# Altium PCB HW_ADHERENT_SYSCTRL_R1.PcbDoc (part 3 of 3)
Units mm, origin at the board's own origin, x right, y up, seen from the top; angles counter-clockwise.
Board outline 160 x 150 mm, 4 copper layers (Top Layer, Int1 (GND), Int2 (PWR), Bottom Layer), stack 1.369 mm thick; 228 components, 143 nets, 829 pads, 0 vias.
Unrouted connection lines stored in the file: 328.
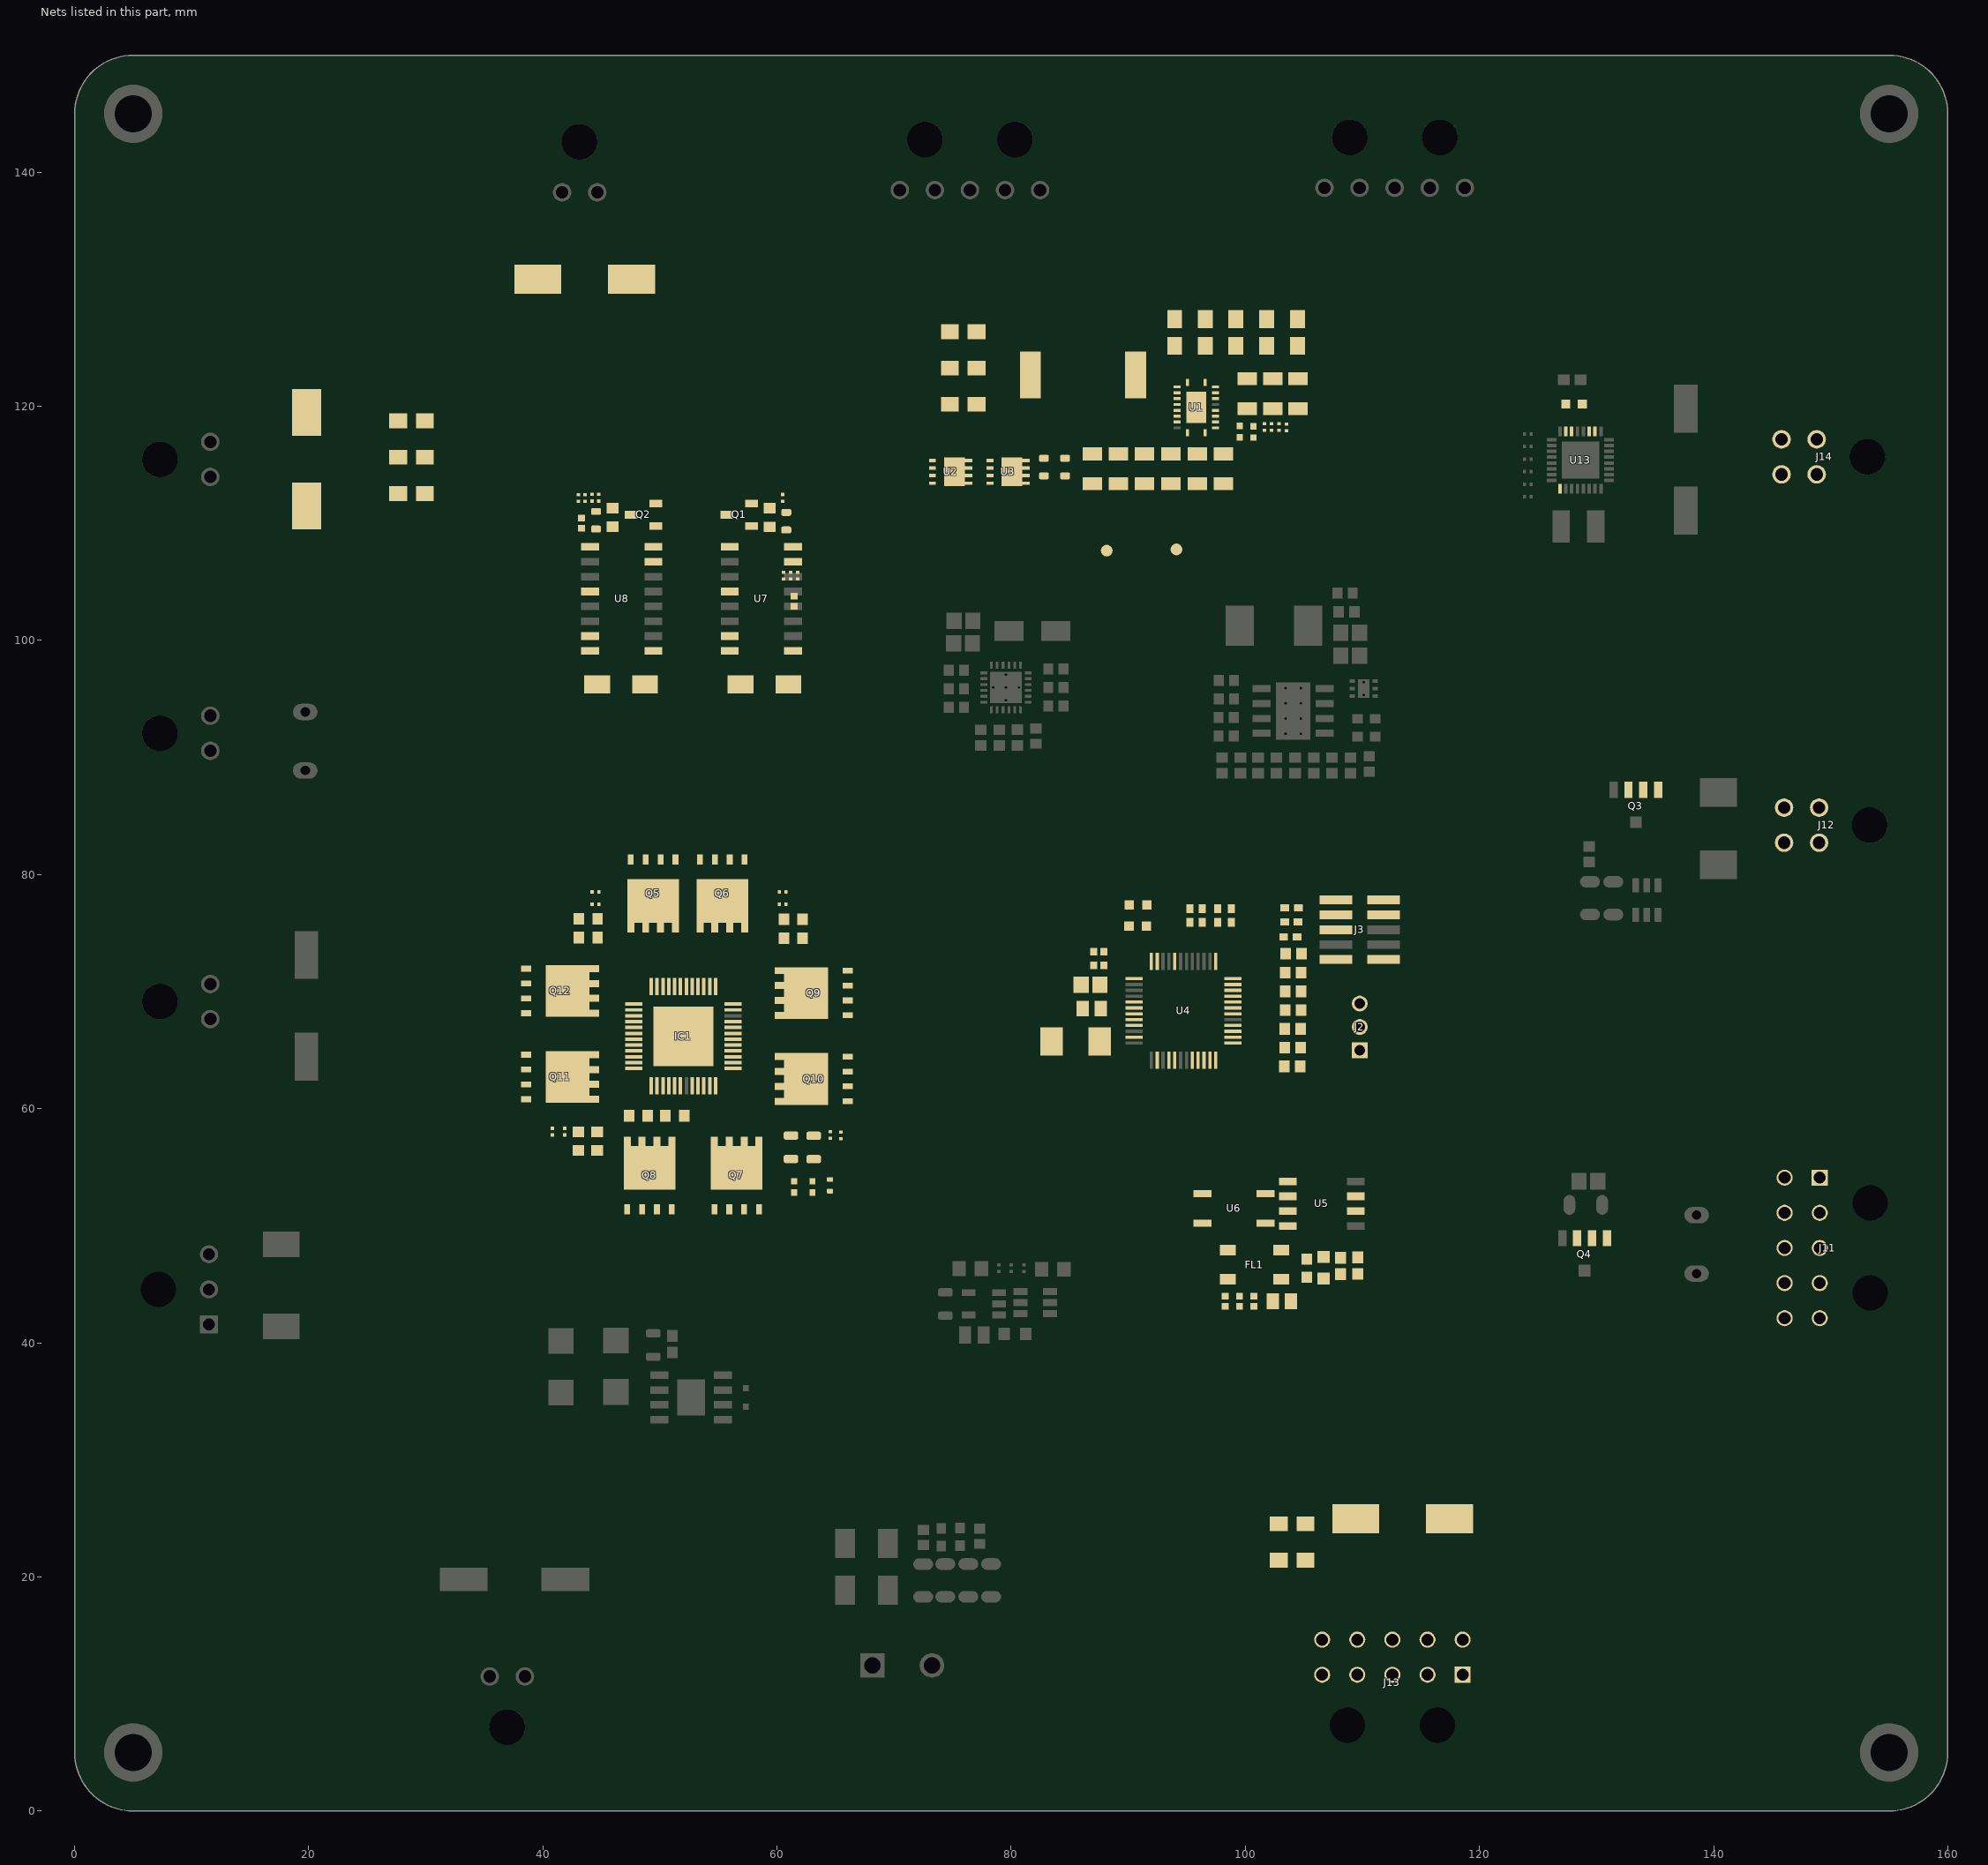
[diagram p4: the nets of this part, all layers, seen from the top]

## Part data (continued)
U7 U8: "4/0 Driver 16-SOIC", manufacturer="Texas Instruments", Supplier="Digi; 296-24344-6-ND"
U9: "OR Controller N+1 ORing Controller N-Channel 1:1 SOT-23-6"
U10: "4.5-V to 60-V, 31mÎ©, 0.6-6A eFuse with output power limiting 24-VQFN -40 to 125", Manufacturer_Name="Texas Instruments", Copyright="Copyright (C) 2025 Ultra Librarian. All rights reserved.", Manufacturer_Part_Number=TPS16637RGER, RefDes=RefDes, Type=TYPE
U11: "1-A, low-IQ high-accuracy low-dropout (LDO) voltage regulator with enable", Package="WSON-6 Texas Instruments", Check_prices=https://www.snapeda.com/parts/TLV75733PDRVR/Texas+Instruments/view-part/?ref=eda, MF="Texas Instruments", MP=TLV75733PDRVR, SnapEDA_Link=https://www.snapeda.com/parts/TLV75733PDRVR/Texas+Instruments/view-part/?ref=snap
U12: "SIMPLE SWITCHERÂ® 3.8V to 36V, 3A Synchronous Buck Converter With Ultra-Low EMI", Package="HSOIC-8 Texas Instruments", Check_prices=https://www.snapeda.com/parts/LMR33630ADDAR/Texas+Instruments/view-part/?ref=eda, MF="Texas Instruments", MP=LMR33630ADDAR, SnapEDA_Link=https://www.snapeda.com/parts/LMR33630ADDAR/Texas+Instruments/view-part/?ref=snap
U13: "Bipolar Motor Driver Power MOSFET SPI, Step/Direction, UART 32-TQFN (5x5)", manufacturer="Analog Devices Inc./Maxim Integrated", Supplier="Digi; 505-TMC2240ATJ+-ND"
U14: "Undefined or Miscellaneous", Manufacturer_Name="Texas Instruments", Mouser Part Number=595-INA181A2IDBVR, Arrow Part Number=INA181A2IDBVR, Arrow Price/Stock=https://www.arrow.com/en/products/ina181a2idbvr/texas-instruments.html?utm_currency=USD&region=nac, Datasheet Link=http://www.ti.com/general/docs/suppproductinfo.tsp?distId=26&gotoUrl=http%3A%2F%2Fwww.ti.com%2Flit%2Fgpn%2Fina181, Height=1.45mm, Manufacturer_Part_Number=INA181A2IDBVR, Mouser Price/Stock=https://www.mouser.co.uk/ProductDetail/Texas-Instruments/INA181A2IDBVR?qs=5aG0NVq1C4wvxWxbAGEmKw%3D%3D
Y1: "8 MHz Â±30ppm Crystal 8pF 100 Ohms 2-SMD, No Lead", Package="SMD-2 ECS Inc.", Check_prices=https://www.snapeda.com/parts/ECS-80-8-30Q-VS-TR/ECS/view-part/?ref=eda, MF="ECS Inc.", MP=ECS-80-8-30Q-VS-TR, SnapEDA_Link=https://www.snapeda.com/parts/ECS-80-8-30Q-VS-TR/ECS/view-part/?ref=snap

## Nets (pads, with @x,y where several pads share a name; then routed paths per layer and width w, separated by ;. In a path a pad name is that pad's centre, name@x,y a point inside that pad or via, vN(x,y) a via of type N, cw(c..) or ccw(c..) an arc to the next point about the centre after c; other vN are vias at no path point)
29_VCC: C64.2 IC1.29 R51.2
+3V3: C11.2 C12.1 C13.1 C14.1 C15.1 C35.2 C37.2 C67.2 FB1.1 FB2.1 IC1.20 IC1.22 J3.1 R6.1 R7.1 R24.2 R25.2 R29.2 R30.2 U4.1 U4.24 U4.36 U4.48 U7.16 U8.16
+3V3_CAN: C22.2 C23.1 FB2.2 U5.3
+12V_SYS: C9.1 C10.1 C25.2 C26.2 C27.2 C28.2 C29.2 L1.2 T1.1
+24V_BUCK_IN: C1.1 C2.2 C3.2 C4.2 C5.2 R1.2 R2.2 U2.D
BOOT0: R6.2 R8.1 U4.44
BOOT1: R9.2 U4.20
CAN1_N: C24.2 FL1.3 R14.1
CAN1_P: C21.1 FL1.4 R13.1
CAN_F_N: FL1.2 U5.6
CAN_F_P: FL1.1 U5.7
CAN_RX: U4.32 U5.4
CAN_TX: U4.33 U5.1
GND: C1.2 C2.1 C3.1 C4.1 C5.1 C6.1 C7.1 C9.2 C10.2 C11.1 C12.2 C13.2 C14.2 C15.2 C16.2 C17.1 C18.1 C19.2 C20.2 C21.2 C22.1 C23.2 C24.1 C25.1 C26.1 C27.1 C28.1 C29.1 C31.1 C35.1 C36.1 C37.1 C38.1 C61.1 C62.1 C63.1 C64.1 C65.1 C67.1 IC1.6 IC1.11 IC1.12 IC1.17 IC1.18 IC1.21 IC1.23 IC1.24 IC1.25 IC1.30 IC1.49 J2.1 J3.3 J3.5 J3.9 Q1.2 Q2.2 R3.1 R4.1 R8.2 R9.1 R11.2 R12.2 R19.1 R23.1 R28.1 R33.1 R59.1 U1.6 U1.12 U1.15 U1.21 U3.S U4.8 U4.23 U4.35 U4.47 U5.2 U6.2 U7.8 U7.15 U8.8 U8.15
LED_STAT: D3.2 U4.16
LED_USER: D4.2 U4.17
NetC6_2: C6.2 R2.1 U1.20
NetC7_2: C7.2 U1.3
NetC8_1: C8.1 C30.2 L1.1 R17.2 U1.19 U2.S U3.D
NetC8_2: C8.2 U1.17
NetC30_1: C30.1 R17.1 U1.11
NetC31_2: C31.2 U1.14
NetC32_1: C32.1 C33.1 C34.1 R22.1 R23.2 U1.5
NetC32_2: C32.2 R21.2 U1.4
NetC33_2: C33.2 R20.1
NetC34_2: C34.2 R21.1
NetC36_2: C36.2 R26.2
NetC38_2: C38.2 R31.2
NetC59_1: C59.1 IC1.40 J12.1 Q5.S Q6.D
NetC59_2: C59.2 IC1.42
NetC60_1: C60.1 IC1.32
NetC60_2: C60.2 IC1.31
NetC61_2: C61.2 D1.1 D2.1 IC1.33 J11.9 J13.9 Q5.D Q7.D Q9.D Q10.D R52.2
NetC62_2: C62.2 IC1.3
NetC63_2: C63.2 IC1.5 R51.1
NetC66_1: C66.1 IC1.37 J12.2 Q7.S Q8.D
NetC66_2: C66.2 IC1.35
NetC68_1: C68.1 IC1.45 J12.4 Q9.S Q11.D
NetC68_2: C68.2 IC1.43
NetC69_1: C69.1 IC1.48 J12.3 Q10.S Q12.D
NetC69_2: C69.2 IC1.2
NetD1_2: D1.2 Q1.3
NetD2_2: D2.2 J13.10 Q2.3
NetD3_1: D3.1 R11.1
NetD4_1: D4.1 R12.1
NetIC1_1: IC1.1
NetIC1_7: IC1.7
NetIC1_8: IC1.8
NetIC1_9: IC1.9
NetIC1_10: IC1.10
NetIC1_13: IC1.13
NetIC1_14: IC1.14
NetIC1_15: IC1.15
NetIC1_16: IC1.16
NetIC1_26: IC1.26
NetIC1_27: IC1.27
NetIC1_28: IC1.28
NetIC1_36: IC1.36 R53.1
NetIC1_38: IC1.38 R54.1
NetIC1_39: IC1.39 R50.1
NetIC1_41: IC1.41 R49.1
NetIC1_44: IC1.44
NetIC1_46: IC1.46 R57.1
NetIC1_47: IC1.47 R58.1
NetJ11_1: J11.1
NetJ11_2: J11.2
NetJ11_3: J11.3
NetJ11_4: J11.4
NetJ11_5: J11.5
NetJ11_6: J11.6
NetJ11_7: J11.7 R25.1 R26.1
NetJ11_8: J11.8 J13.8
NetJ11_10: J11.10
NetJ13_1: J13.1
NetJ13_2: J13.2
NetJ13_3: J13.3
NetJ13_4: J13.4
NetJ13_5: J13.5
NetJ13_6: J13.6
NetJ13_7: J13.7
NetJ14_1: J14.1 U13.23
NetJ14_2: J14.2 U13.22
NetJ14_3: J14.3 U13.18
NetJ14_4: J14.4 U13.19
NetQ1_1: Q1.1 R27.2
NetQ2_1: Q2.1 R32.2
NetQ3_1: Q3.1 Q3.2 Q3.3
NetQ4_1: Q4.1 Q4.2 Q4.3
NetQ5_G: Q5.G R49.2
NetQ6_G: Q6.G R50.2
NetQ6_S: Q6.S Q8.S
NetQ7_G: Q7.G R53.2
NetQ8_G: Q8.G R54.2
NetQ9_G: Q9.G R55.2
NetQ10_G: Q10.G R56.2
NetQ11_G: Q11.G R57.2
NetQ11_S: Q11.S Q12.S
NetQ12_G: Q12.G R58.2
NetR1_1: R1.1 R3.2 U1.1
NetR4_2: R4.2 U1.2
NetR5_1: R5.1 U1.18
NetR5_2: R5.2 U2.G
NetR13_2: R13.2 U6.3
NetR14_2: R14.2 U6.4
NetR15_1: R15.1 U6.1
NetR15_2: R15.2 U4.14
NetR16_1: R16.1
NetR16_2: R16.2 U1.8
NetR18_1: R18.1 U1.13
NetR18_2: R18.2 U3.G
NetR19_2: R19.2 U1.10
NetR20_2: R20.2 R22.2
NetR24_1: R24.1 R29.1 U7.12 U8.12
NetR27_1: R27.1 R28.2
NetR30_1: R30.1 R31.1
NetR32_1: R32.1 R33.2
NetR55_1: R55.1
NetR56_1: R56.1
NetR59_2: R59.2 U13.1
NetT2_1: T2.1 U1.7
NetU4_11: U4.11
NetU7_1: U7.1
NetU7_7: U7.7
NetU7_9: U7.9
NetU8_1: U8.1
NetU8_7: U8.7
NetU8_9: U8.9
NFC_IRQ: U4.22
NFC_RESET: U4.21
NRST: C16.1 J3.10 R7.2 U4.7
OSC_IN: C18.2 U4.5 Y1.2
OSC_OUT: R10.1 U4.6
OSC_OUT_Y: C17.2 R10.2 Y1.1
SPI2_CS_NFC: U4.25
SPI2_MISO: U4.27
SPI2_MOSI: U4.28
SPI2_SCLK: U4.26
SWCLK: J3.4 U4.37
SWDIO: J3.2 U4.34
USART1_RX: J2.3 U4.31
USART1_TX: J2.2 U4.30
VDDA: C19.1 C20.1 FB1.2 U4.9
VSA: C65.2 IC1.4 R52.1
pads on no net: C39.1 C39.2 C40.1 C40.2 C41.1 C41.2 C42.1 C42.2 C43.1 C43.2 C44.1 C44.2 C45.1 C45.2 C46.1 C46.2 C47.1 C47.2 C48.1 C48.2 C49.1 C49.2 C50.1 C50.2 C51.1 C51.2 C52.1 C52.2 C53.1 C53.2 C54.1 C54.2 C55.1 C55.2 C56.1 C56.2 C57.1 C57.2 C58.1 C58.2 C70.1 C70.2 C71.1 C71.2 C72.1 C72.2 C73.1 C73.2 C74.1 C74.2 C75.1 C75.2 C76.1 C76.2 C77.1 C77.2 C78.1 C78.2 C79.1 C79.2 C80.1 C80.2 C81.1 C81.2 C82.1 C82.2 C83.1 C83.2 D5.1 D5.2 D6.1 D6.2 D7.1 D7.2 D8.1 D8.2 D9.1 D9.2 D10.1 D10.2 D11.1 D11.2 D12.1 D12.2 D13.1 D13.2 D14.1 D14.2 D15.1 D15.2 D16.1 D16.2 F1.1 F1.2 F2.1 F2.2 F3.1 F3.2 F4.1 F4.2 F5.1 F5.2 F6.1 F6.2 F7.1 F7.2 IC1.19 IC1.34 IC2.1 IC2.2 IC2.3 IC2.4 IC2.5 IC2.6 IC2.7 IC2.8 IC2.9 IC3.1 IC3.2 IC3.3 IC3.4 IC3.5 J1.01 J1.02 J3.6 J3.7 J3.8 J4. J4.1 J4.2 J5. J5.1 J5.2 J6. J6.1 J6.2 J7. J7.1 J7.2 J8. J8.1 J8.2 J8.3 J8.4 J8.5 J9. J9.1 J9.2 J9.3 J9.4 J9.5 J10. J10.1 J10.2 J11.11 J11.12 J12. J13.11 J13.12 J14. J15.1 J15.2 J15.3 J15.4 L2.1 L2.2 MTG1.0 MTG2.0 MTG3.0 MTG4.0 Q3.4 Q3.5_6_7_8 Q4.4 Q4.5_6_7_8 R34.1 R34.2 R35.1 R35.2 R36.1 R36.2 R37.1 R37.2 R38.1 R38.2 R39.1 R39.2 R40.1 R40.2 R41.1 R41.2 R42.1 R42.2 R43.1 R43.2 R44.1 R44.2 R45.1 R45.2 R46.1 R46.2 R47.1 R47.2 R48.1 R48.2 R60.1 R60.2 R61.1 R61.2 R62.1 R62.2 R63.1 R63.2 R64.1 R64.2 R65.1 R65.2 R66.1 R66.2 U1.9 U1.16 U4.2 U4.3 U4.4 U4.10 U4.12 U4.13 U4.15 U4.18 U4.19 U4.29 U4.38 U4.39 U4.40 U4.41 U4.42 U4.43 U4.45 U4.46 U5.5 U5.8 U7.2 U7.3 U7.4 U7.5 U7.6 U7.10 U7.11 U7.13 U7.14 U8.2 U8.3 U8.4 U8.5 U8.6 U8.10 U8.11 U8.13 U8.14 U9.1 U9.2 U9.3 U9.4 U9.5 U9.6 U10.1 U10.2 U10.3 U10.4 U10.5 U10.6 U10.7 U10.8 U10.9 U10.10 U10.11 U10.12 U10.13 U10.14 U10.15 U10.16 U10.17 U10.18 U10.19 U10.20 U10.21 U10.22 U10.23 U10.24 U10.25 U10.V U11.1 U11.2 U11.3 U11.4 U11.5 U11.6 U11.7 U11.8 U11.9 U12.1 U12.2 U12.3 U12.4 U12.5 U12.6 U12.7 U12.8 U12.9 U12.10 U12.11 U12.12 U12.13 U12.14 U12.15 U12.16 U12.17 U13.2 U13.3 U13.4 U13.5 U13.6 U13.7 U13.8 U13.9 U13.10 U13.11 U13.12 U13.13 U13.14 U13.15 U13.16 U13.17 U13.20 U13.21 U13.24 U13.25 U13.26 U13.27 U13.28 U13.29 U13.30 U13.31 U13.32 U13.33 U14.1 U14.2 U14.3 U14.4 U14.5 U14.6

## Polygon pours and split planes (outlines as drawn)
no net on Int1 (GND) (split plane): 5,149.49 155,149.49 155.018,149.491 155.294,149.482 155.586,149.453 155.876,149.406 156.163,149.339 156.444,149.253 156.719,149.15 156.987,149.029 157.246,148.89 157.496,148.735 157.734,148.564 157.962,148.377 158.176,148.176 158.377,147.962 158.564,147.734 158.735,147.496 158.89,147.246 159.029,146.987 159.15,146.719 159.253,146.444 159.339,146.163 159.406,145.876 159.453,145.586 159.482,145.294 159.491,145.018 159.49,145 159.49,5 159.491,4.982 159.482,4.706 159.453,4.414 159.406,4.124 159.339,3.837 159.253,3.556 159.15,3.281 159.029,3.013 158.89,2.754 158.735,2.504 158.564,2.266 158.377,2.038 158.176,1.824 157.962,1.623 157.734,1.436 157.496,1.265 157.246,1.11 156.987,0.971 156.719,0.85 156.444,0.747 156.163,0.661 155.876,0.594 155.586,0.547 155.294,0.518 155.018,0.509 155,0.51 5,0.51 4.982,0.509 4.706,0.518 4.414,0.547 4.124,0.594 3.837,0.661 3.556,0.747 3.281,0.85 3.013,0.971 2.754,1.11 2.504,1.265 2.266,1.436 2.038,1.623 1.824,1.824 1.623,2.038 1.436,2.266 1.265,2.504 1.11,2.754 0.971,3.013 0.85,3.281 0.747,3.556 0.661,3.837 0.594,4.124 0.547,4.414 0.518,4.706 0.509,4.982 0.51,5 0.51,145 0.509,145.018 0.518,145.294 0.547,145.586 0.594,145.876 0.661,146.163 0.747,146.444 0.85,146.719 0.971,146.987 1.11,147.246 1.265,147.496 1.436,147.734 1.623,147.962 1.824,148.176 2.038,148.377 2.266,148.564 2.504,148.735 2.754,148.89 3.013,149.029 3.281,149.15 3.556,149.253 3.837,149.339 4.124,149.406 4.414,149.453 4.706,149.482 4.982,149.491
no net on Int2 (PWR) (split plane): 5,149.49 155,149.49 155.018,149.491 155.294,149.482 155.586,149.453 155.876,149.406 156.163,149.339 156.444,149.253 156.719,149.15 156.987,149.029 157.246,148.89 157.496,148.735 157.734,148.564 157.962,148.377 158.176,148.176 158.377,147.962 158.564,147.734 158.735,147.496 158.89,147.246 159.029,146.987 159.15,146.719 159.253,146.444 159.339,146.163 159.406,145.876 159.453,145.586 159.482,145.294 159.491,145.018 159.49,145 159.49,5 159.491,4.982 159.482,4.706 159.453,4.414 159.406,4.124 159.339,3.837 159.253,3.556 159.15,3.281 159.029,3.013 158.89,2.754 158.735,2.504 158.564,2.266 158.377,2.038 158.176,1.824 157.962,1.623 157.734,1.436 157.496,1.265 157.246,1.11 156.987,0.971 156.719,0.85 156.444,0.747 156.163,0.661 155.876,0.594 155.586,0.547 155.294,0.518 155.018,0.509 155,0.51 5,0.51 4.982,0.509 4.706,0.518 4.414,0.547 4.124,0.594 3.837,0.661 3.556,0.747 3.281,0.85 3.013,0.971 2.754,1.11 2.504,1.265 2.266,1.436 2.038,1.623 1.824,1.824 1.623,2.038 1.436,2.266 1.265,2.504 1.11,2.754 0.971,3.013 0.85,3.281 0.747,3.556 0.661,3.837 0.594,4.124 0.547,4.414 0.518,4.706 0.509,4.982 0.51,5 0.51,145 0.509,145.018 0.518,145.294 0.547,145.586 0.594,145.876 0.661,146.163 0.747,146.444 0.85,146.719 0.971,146.987 1.11,147.246 1.265,147.496 1.436,147.734 1.623,147.962 1.824,148.176 2.038,148.377 2.266,148.564 2.504,148.735 2.754,148.89 3.013,149.029 3.281,149.15 3.556,149.253 3.837,149.339 4.124,149.406 4.414,149.453 4.706,149.482 4.982,149.491

## Keep-outs
Keep-Out Layer:
  the board outline again, w0.4

## Text inside footprints (layer, text, board x,y; h text height)
C39: Top Overlay "+" at 21.1,89.19 h0.64 r270
C40: Top Overlay "+" at 139.95,46.21 h0.64 r270
F1: Mechanical 17 "1" at 130.477,51.422 h0.64 r180; Mechanical 17 "2" at 127.683,51.422 h0.64 r180
F2: Mechanical 17 "1" at 131.791,79.377 h0.64 r270; Mechanical 17 "2" at 131.791,76.583 h0.64 r270
F3: Mechanical 17 "1" at 129.084,76.593 h0.64 r90; Mechanical 17 "2" at 129.084,79.387 h0.64 r90
F4: Mechanical 17 "1" at 74.727,21.095 h0.64 r270; Mechanical 17 "2" at 74.727,18.301 h0.64 r270
F5: Mechanical 17 "1" at 72.126,18.291 h0.64 r90; Mechanical 17 "2" at 72.126,21.085 h0.64 r90
F6: Mechanical 17 "1" at 75.986,18.301 h0.64 r90; Mechanical 17 "2" at 75.986,21.095 h0.64 r90
F7: Mechanical 17 "1" at 77.926,18.301 h0.64 r90; Mechanical 17 "2" at 77.926,21.095 h0.64 r90
U4: Mechanical 13 "*" at 91.189,70.722 h0.64